# Altium PCB charger.PcbDoc
Units mm, origin at the board's own origin, x right, y up, seen from the top; angles counter-clockwise.
Board outline 60.83 x 20.32 mm, 2 copper layers (Top Layer, Bottom Layer); 29 components, 18 nets, 133 pads, 33 vias.
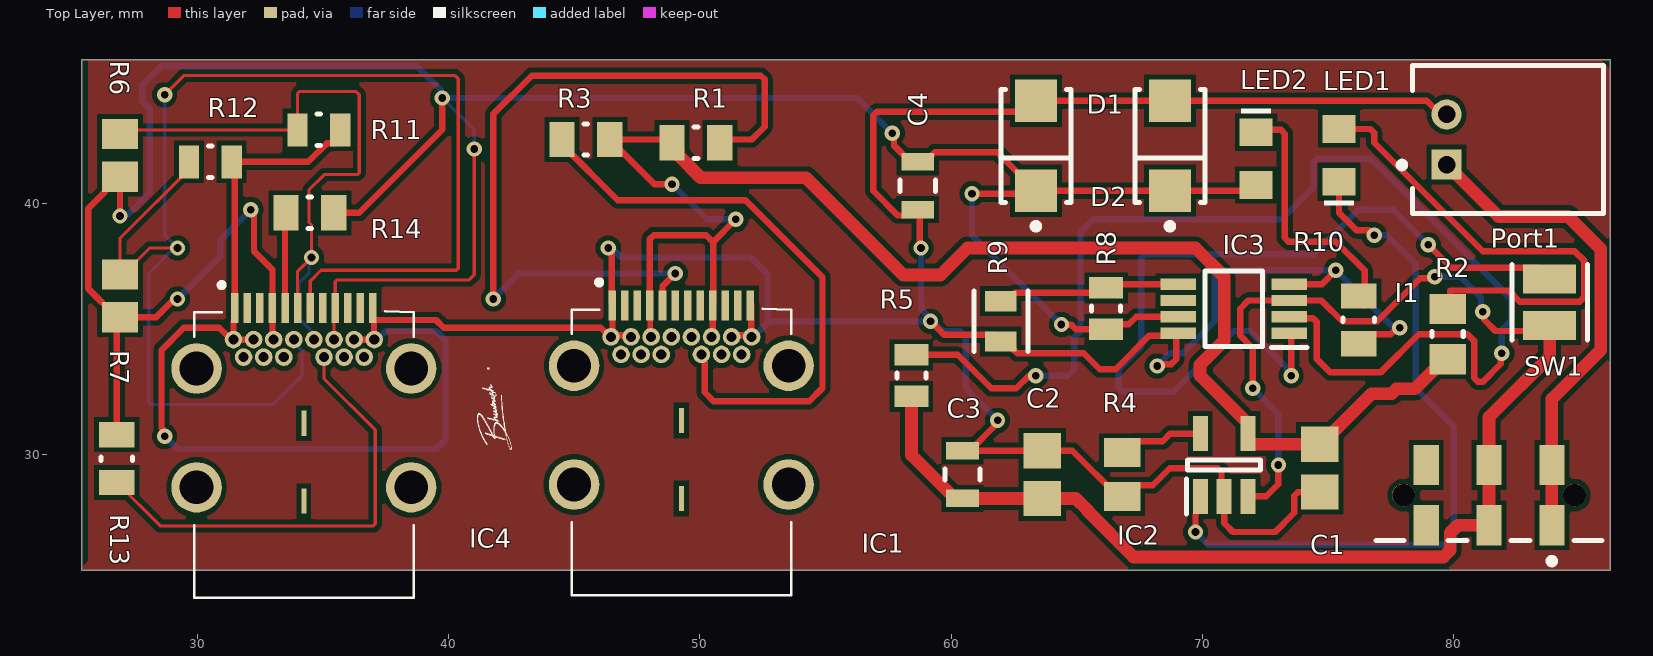
[diagram p0: Top Layer view]
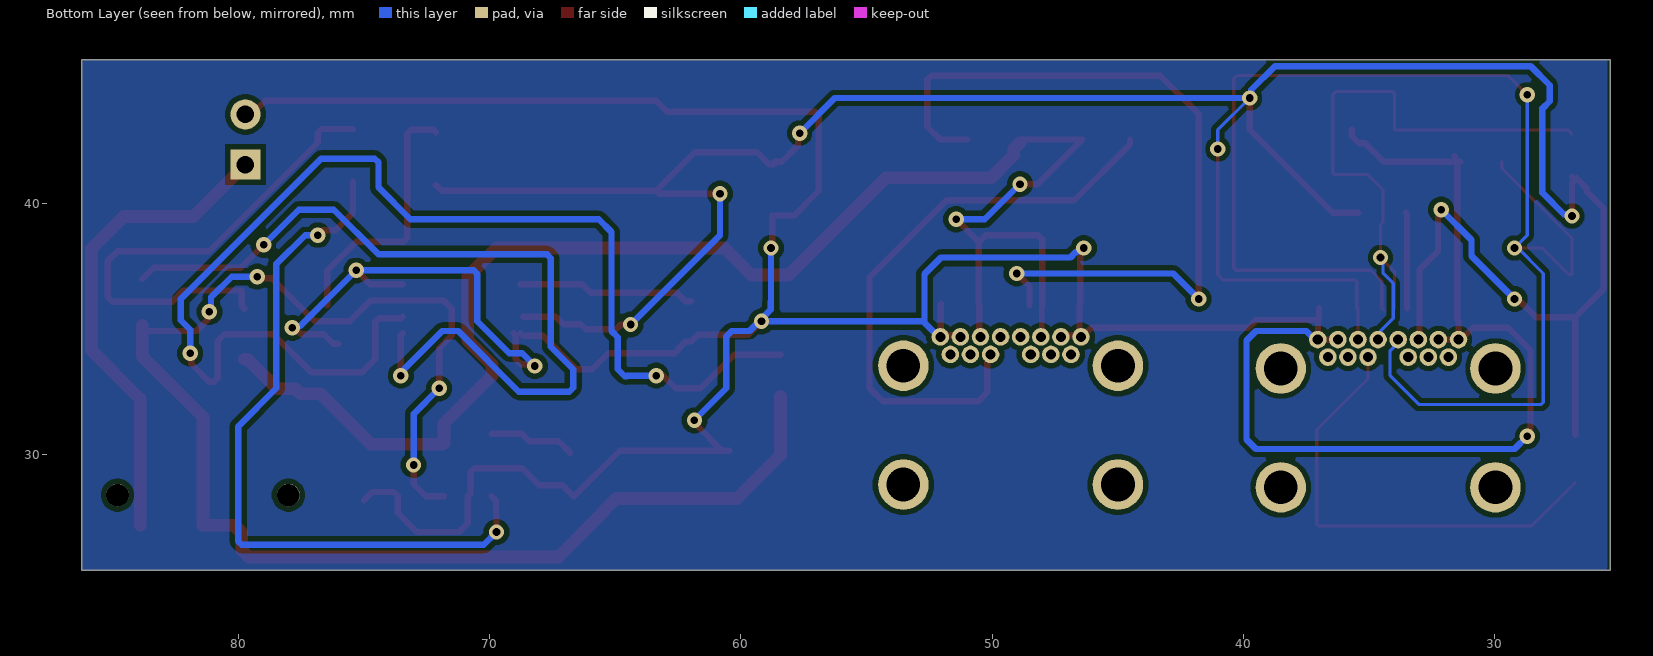
[diagram p1: Bottom Layer view, seen from below]
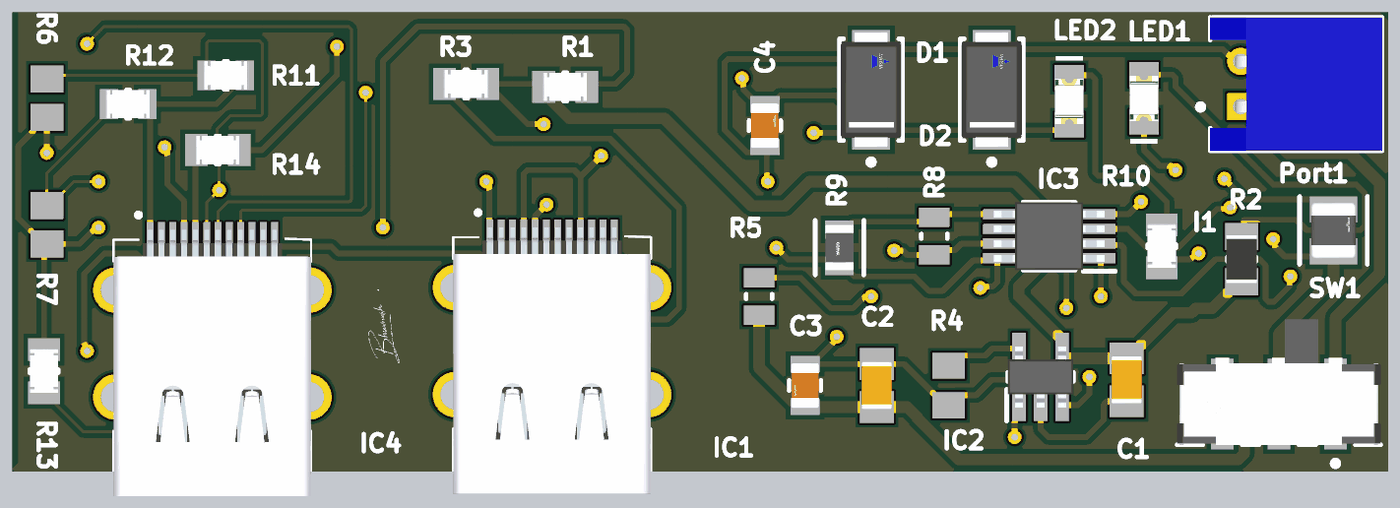
[diagram p2: 3D render of the assembled board from above, using the file's embedded part models]

## Layer stack, top to bottom
Top Solder: solder mask 0.0102, Solder Resist, Dk 3.5
Top Layer: signal copper 0.0356
Dielectric 1: dielectric 0.32, FR-4, Dk 4.8
Bottom Layer: signal copper 0.0356
Bottom Solder: solder mask 0.0102, Solder Resist, Dk 3.5

## Board outline
25.4,25.4 86.233,25.4 86.233,45.72 25.4,45.72

## Design rules (kind name [scope] priority, off if disabled: settings)
Clearance [All] p1: gap=0.203 ignorepadtopadclearanceinfootprint=TRUE
MinimumSolderMaskSliver [All] p1: minsoldermaskwidth=0.076
PolygonConnect [All] p1: connectstyle=Direct reliefconductorwidth=0.254 reliefentries=4 polygonreliefangle="90 Angle" airgapwidth=0.254
RoutingVias [All] p1: holewidth=0.711 width=1.27 viastyle="Through Hole" minholewidth=0.711 minwidth=1.27 maxholewidth=0.711 maxwidth=1.27
SilkToSilkClearance [All] p1: silktosilkclearance=0.104
SilkToSolderMaskClearance [IsPad] p1: minsilkscreentomaskgap=0.127 clearancetoexposedcopper=TRUE
SolderMaskExpansion [All] p1: expansion=0.102 istentingtop=FALSE
SupplyNets "Schematic Supply Nets_1" [InNet('+5')] p1: voltage=0.000
SupplyNets "Schematic Supply Nets" [InNet('GND')] p2: voltage=0.000
Width PowerNets [All] p1: maxlimit=1.27 minlimit=0.127 preferedwidth=0.508
Width [All] p2: maxlimit=0.254 minlimit=0.254 preferedwidth=0.254
27 further rules are at their usual default settings.

## Classes and differential pairs
net class PowerNets: 5VIN +5 NetC2_2 NetI1_2 NetPort1_1
component class Sheet2: C3 C4 D1 D2 LED2 R5 R6 R7 R8 R9 R11 R13
component class Sheet1: C1 C2 IC1 IC2 LED1 Port1 R1 R2 R4 SW1

## Components (designator, comment, footprint, x,y, rotation, side; value= is the part's Value field where it differs from the comment)
C1 "4.7uf" CAPC2013X135X45LL10T25 74.676,29.464 r270 top
C2 "4.7uf" CAPC2013X135X45LL10T25 63.627,29.21 r270 top
C3 "22uf" FP-GRM21B-0_15-MFG 60.452,29.21 r270 top
C4 "22uf" FP-GRM21B-0_15-MFG 58.674,40.706 r90 top
D1 "40v/1.5A" FP-95400-MFG 63.373,42.291 r90 top value=134pF
D2 "40v/1.5A" FP-95400-MFG 68.707,42.291 r90 top value=134pF
I1 "2.2uH" FP-LQM2HPN_G0-IPC_C 83.82,36.068 r90 top
IC1 "632723100011" 632723100011 49.264,30.661 r0 top
IC2 "MCP73831T-2ACI_OT" SOT95P270X145-5N 70.866,29.591 r90 top
IC3 "PAM2401SCADJ" SOP65P490X110-8N 71.247,35.814 r180 top
IC4 "632723100011" 632723100011 34.242,30.552 r0 top
LED1 "CHG" WL-SMCW_0805_150080xx75000 75.438,41.91 r90 top
LED2 "CHG" WL-SMCW_0805_150080xx75000 72.136,41.783 r270 top
Port1 "Battery" JST-S2B-PH-K-S_V 82.169,42.545 r90 top
R1 "56k" FP-CRCW0805-e3-IPC_B 49.846,42.418 r180 top
R2 "1k" RESC2013X60X35ML10T20 79.756,34.798 r90 top
R3 "56k" FP-CRCW0805-e3-IPC_B 45.466,42.545 r0 top
R4 "2k" RESC2013X70X40NL20T20 66.802,29.21 r270 top
R5 "750k" RESC2013X50X30LL20T20 58.42,33.147 r270 top
R6 "75k" RESC2013X60X40NL20T25 26.924,41.91 r270 top
R7 "75k" RESC2013X60X40NL20T25 26.924,36.322 r270 top
R8 "750k" RESC2013X50X30LL20T20 66.167,35.814 r270 top
R9 "100k" FP-RC0805-0_6-IPC_C 61.976,35.306 r90 top
R10 "4.7k" FP-CRCW0805-e3-IPC_B 76.227,35.368 r90 top
R11 "49.9k" FP-CRCW0805-e3-IPC_C 34.836,42.926 r180 top
R12 "49.9k" FP-CRCW0805-e3-IPC_C 30.518,41.656 r180 top
R13 "56k" FP-CRCW0805-e3-IPC_B 26.797,29.845 r90 top
R14 "56k" FP-CRCW0805-e3-IPC_B 34.482,39.624 r0 top
SW1 "PWR" FP-JS102011JAQN-MFG 81.407,28.391 r180 top

## Footprints (in the part's own frame and the unit in brackets; to place one, negate y for a bottom-side part, rotate by r counter-clockwise, add the part's x,y. Pads: shape width x height; smd on the part's side, far side on the other; paste and mask are expansions set on the pad)
632723100011 [mm]
  rect 0.3x1.2 smd: A1(-2.75,5.28) A2(-2.25,5.28) A3(-1.75,5.28) A4(-1.25,5.28) A5(-0.75,5.28) A6(-0.25,5.28) A7(0.25,5.28) A8(0.75,5.28) A9(1.25,5.28) A10(1.75,5.28) A11(2.25,5.28) A12(2.75,5.28)
  round 0.7 hole 0.4: B1(2.8,4.03) B2(2.4,3.33) B3(1.6,3.33) B4(1.2,4.03) B5(0.8,3.33) B6(0.4,4.03) B7(-0.4,4.03) B8(-0.8,3.33) B9(-1.2,4.03) B10(-1.6,3.33) B11(-2.4,3.33) B12(-2.8,4.03) G1(-2,4.03) G2(2,4.03)
  round 2.01 hole 1.34: MH1(-4.27,2.88) MH2(4.27,2.88) MH3(-4.27,-1.85) MH4(4.27,-1.85)
  rect 0.2x1 smd: MP1(0,0.7) MP2(0,-2.4)
  silkscreen extent -4.37,-6.25 4.37,6.25, body extent -4.37,-6.24 4.37,5.55, height 2.93
CAPC2013X135X45LL10T25 [mm] "Chip Capacitor, 2-Leads, Body 2.10x1.35mm, IPC High Density"
  rect 1.4x1.5 smd: 1(-0.95,0) 2(0.95,0)
  body extent -1.05,-0.67 1.05,0.67, height 1.35
FP-95400-MFG [mm]
  rect 1.7x1.68 smd paste+0 mask+0: 1(-1.79,0) 2(1.79,0)
  silkscreen extent -3.32,-1.4 2.25,1.4, body extent -2.74,-1.5 2.74,1.5, height 0.25
FP-CRCW0805-e3-IPC_B [mm]
  rect 1.007x1.408 smd paste+0 mask+0: 1(-0.951,0) 2(0.951,0)
  silkscreen extent -0.07,-0.63 0.07,0.63, body extent -1.7,-0.95 1.7,0.95, height 0.25
FP-CRCW0805-e3-IPC_C [mil]
  rect 31.75x51.5 smd paste+0 mask+0: 1(-33.5,0) 2(33.5,0)
  silkscreen extent -3,-25 3,25, body extent -53,-31 53,31, height 10
FP-GRM21B-0_15-MFG [mm]
  rect 0.7x1.3 smd paste+0 mask+0: 1(-0.95,0) 2(0.95,0)
  silkscreen extent -0.23,-0.7 0.23,0.7, body extent -1.4,-0.8 1.4,0.8, height 0.25
FP-JS102011JAQN-MFG [mm]
  rect 1x1.6 smd paste+0 mask+0: 1(-2.5,-1.2) 1(-2.5,1.2) 2(0,1.2) 2(0,-1.2) 3(2.5,-1.2) 3(2.5,1.2)
  round 0.9 hole 0.9 unplated paste-2539.97 mask+0: ""(-3.4,0) ""(3.4,0)
  silkscreen extent -4.5,1.8 4.5,2.75, body extent -4.6,-3.9 4.6,2.1, height 0.25
FP-LQM2HPN_G0-IPC_C [mm]
  rect 1.155x2.106 smd paste+0 mask+0: 1(-0.926,0) 2(0.926,0)
  silkscreen extent -1.5,-1.5 1.5,1.5, body extent -1.6,-1.2 1.6,1.2, height 0.25
FP-RC0805-0_6-IPC_C [mm]
  rect 0.808x1.262 smd paste+0 mask+0: 1(-0.802,0) 2(0.802,0)
  silkscreen extent -1.21,-1.07 1.21,1.07, body extent -1.31,-0.77 1.31,0.77, height 0.25
JST-S2B-PH-K-S_V [mm] "THD, 2-Leads, Body 7.6x5.9mm, Pitch 2mm"
  rect 1.2x1.2 hole 0.7: 1(-1,2.45)
  round 1.2 hole 0.7: 2(1,2.45)
  silkscreen extent -2.95,-3.8 2.95,4.35, body extent -2.95,-3.8 2.95,3.8, height 4.8
RESC2013X50X30LL20T20 [mm] "Chip Resistor, 2-Leads, Body 2.00x1.25mm, IPC High Density"
  rect 0.85x1.35 smd: 1(-0.825,0) 2(0.825,0)
  silkscreen extent -0.1,-0.58 0.1,0.58, body extent -1.1,-0.72 1.1,0.72, height 0.5
RESC2013X60X35ML10T20 [mm] "Chip Resistor, 2-Leads, Body 2.1x1.35mm, IPC Low Density"
  rect 1.2x1.45 smd: 1(-1,0) 2(1,0)
  silkscreen extent -0.1,-0.63 0.1,0.63, body extent -1.05,-0.68 1.05,0.67, height 0.6
RESC2013X60X40NL20T25 [mm] "Chip Resistor, 2-Leads, Body 2.00x1.25mm, IPC Medium Density"
  rect 1.2x1.45 smd: 1(-0.85,0) 2(0.85,0)
  body extent -1.1,-0.72 1.1,0.72, height 0.6
RESC2013X70X40NL20T20 [mm] "Chip Resistor, 2-Leads, Body 2.2x1.35mm, IPC Medium Density"
  rect 1.15x1.45 smd: 1(-0.875,0) 2(0.875,0)
  body extent -1.1,-0.72 1.1,0.72, height 0.7
SOP65P490X110-8N [mm]
  rect 1.425x0.45 smd: 1(-2.212,0.975) 2(-2.212,0.325) 3(-2.212,-0.325) 4(-2.212,-0.975) 5(2.212,-0.975) 6(2.212,-0.325) 7(2.212,0.325) 8(2.212,0.975)
  silkscreen extent -2.93,-1.5 1.15,1.55, body extent -2.45,-1.5 2.45,1.5, height 1.1
SOT95P270X145-5N [mm]
  rect 1.4x0.6 smd: 1(-1.25,0.95) 2(-1.25,0) 3(-1.25,-0.95) 4(1.25,-0.95) 5(1.25,0.95)
  silkscreen extent -1.95,-1.45 0.2,1.5, body extent -1.35,-1.45 1.35,1.45, height 1.45
WL-SMCW_0805_150080xx75000 [mm] "SMD Mono-color Chip LED, body 2.0x1.25mm"
  rect 1.1x1.3 smd: 1(-1.05,0) 2(1.05,0)
  silkscreen extent -2,-0.6 -1.8,0.6, body extent -1,-0.63 1,0.62, height 0.7

## Part data
C1 C2: library part CMP-1662-00015-2, "Chip Capacitor, 4.7 uF, +/- 10%, 16 V, -55 to 85 degC, 0805 (2012 Metric), RoHS, Tape and Reel", Capacitance="4.7 uF", Case Code (Imperial)=0805, Case Code (Metric)=2012, Max Operating Temperature="85 degC", Min Operating Temperature="-55 degC", Package Quantity=3000, PartNumber=GRM21BR61C475KA88L, Tolerance=10%, Type (Capacitors)=X5R, Voltage Rating="16 V", Case\/Package=0805, ComponentLink1Description="Manufacturer URL", ComponentLink1URL=http://www.murata.com/, ComponentLink2Description=Datasheet, ComponentLink2URL=http://search.murata.co.jp/Ceramy/image/img/A01X/G101/ENG/GRM21BR61C475KA88-01.pdf, DatasheetVersion=03/2016, Height="1.25 mm", Length="2 mm", Mount="Surface Mount", Mounting Technology="Surface Mount", PackageDescription="2-Pin Surface Mount Device, Body 2 x 1.25 mm", PackageReference=0805, Packaging="Tape and Reel", Pins=2, Radiation Hardening=No, REACH SVHC="No SVHC", RoHSCompliant=true, Voltage Rating (DC)="16 V", Width="1.25 mm"
C3 C4: library part CMP-2007-03385-2, "Chip Multilayer Ceramic Capacitors for General Purpose, 0805, 22uF, X5R, 15%, 20%, 6.3V", Capacitance=22uF, Case Code (Imperial)=0805, Case Code (Metric)=2012, Dielectric=X5R, Max Operating Temperature=85°C, Min Operating Temperature=-55°C, Package Quantity=1, Tolerance=20%, Voltage=6.3V, Case/Package=0805, Depth=1.25mm, Height=1.25mm, Lead Free="Lead Free", Length=2mm, Material=Ceramic, Mount="Surface Mount", Packaging="Tape and Reel", Radiation Hardening=No, REACH SVHC="No SVHC", Termination=SMD/SMT, Thickness=0.053inch, Voltage Rating=6.3V, Voltage Rating (DC)=6.3V, Width=0.049inch
D1 D2: library part CMP-02539-000025-1, "DIODE SCHOTTKY 40V 1.5A SMA", Capacitance=134pF, Forward Current=1.5A, Manufacturer=Vishay, Manufacturer Part Number=VS-15MQ040NTRPBF, Max Junction Temp=+150°C, Max Repetitive Reverse Voltage=40V, Max Surge Forward Current=140A, Package=95400, Peak Reverse Current=0.5mA, Temperature="-40°C to +150°C", Temperature Range Low=-40°C, Automotive=No, Category=Diode, ComponentLink2Description=Datasheet, ComponentLink2URL=http://www.vishay.com/docs/94141/vs-15mq040ntrpbf.pdf, Device Class L1="Discrete Semiconductors", Device Class L2=Diodes, Device Class L3="Schottky Diodes", Digikey Description="DIODE SCHOTTKY 40V 1.5A SMA", Footprint Url=http://www.vishay.com/docs/95400/sma.pdf, Height=2.29mm, Lead Free=Yes, Mouser Description="Schottky Diodes & Rectifiers 2.1 Amp 40 Volt", Octopart=https://octopart.com/vs-15mq040ntrpbf-vishay-44340959, Reverse Voltage=40V, RoHS=TRUE, Standoff Height=0mm, Temperature Range High=+150°C
I1: library part CMP-1662-00028-2, "Multilayer Type Inductor for Power Lines, 1008 (2520), 2.2μH, 20%, 0.1Ω, 1.3A", Case Code (Imperial)=1008, Case Code (Metric)=2520, Current Rating=1.3A, DC Resistance (DCR)=100mR, Inductance Tolerance=20%, Max Operating Temperature=125°C, Min Operating Temperature=-55°C, Package Quantity=3000, Self Resonant Frequency=40MHz, Test Frequency=1MHz, Case/Package=1008, Core Material=Ferrite, DC Current=1.3A, Depth=2.2mm, Height=1.2mm, Height - Seated (Max)=0.039inch, Inductance=2.2uH, Lead Free="Lead Free", Length=2.5mm, Max DC Current=1.3A, Military Standard=Not, Mount="Surface Mount", Packaging="Tape and Reel", Radiation Hardening=No, REACH SVHC="No SVHC", Series=LQM2HP_G0, Shielding=Shielded, Termination=SMD/SMT, Tolerance=20%, Width=2mm
IC1 IC4: "Integrated Circuit", Manufacturer_Name="Wurth Elektronik", Mouser Part Number=710-632723100011, Datasheet Link=https://componentsearchengine.com/Datasheets/1/632723100011.pdf, Height=3.11mm, Manufacturer_Part_Number=632723100011, Mouser Price/Stock=https://www.mouser.co.uk/ProductDetail/Wurth-Elektronik/632723100011?qs=NK6InXoXhq4o62C9ULXLjQ%3D%3D
IC2: "Integrated Circuit", Arrow Part Number=MCP73831T-2ACI/OT, Manufacturer_Name=Microchip, Mouser Part Number=579-MCP73831T-2ACIOT, Arrow Price/Stock=https://www.arrow.com/en/products/mcp73831t-2aciot/microchip-technology?utm_currency=USD&region=nac, Datasheet Link=http://ww1.microchip.com/downloads/en/DeviceDoc/20001984g.pdf, Height=1.45mm, Manufacturer_Part_Number=MCP73831T-2ACI/OT, Mouser Price/Stock=https://www.mouser.co.uk/ProductDetail/Microchip-Technology/MCP73831T-2ACI-OT?qs=yUQqVecv4qvbBQBGbHx0Mw%3D%3D
IC3: "Integrated Circuit", Manufacturer_Name="Diodes Incorporated", Mouser Part Number=621-PAM2401SCADJ, Arrow Part Number=PAM2401SCADJ, Arrow Price/Stock=https://www.arrow.com/en/products/pam2401scadj/diodes-incorporated?region=nac, Datasheet Link=https://www.diodes.com//assets/Datasheets/PAM2401.pdf, Height=1.1mm, Manufacturer_Part_Number=PAM2401SCADJ, Mouser Price/Stock=https://www.mouser.co.uk/ProductDetail/Diodes-Incorporated/PAM2401SCADJ?qs=Ay79KZaUeZCprHtLIDXq%252BQ%3D%3D
LED1: library part CMP-1426-00011-3, "LED Uni-Color Red 630nm 2-Pin Chip 0805(2012Metric) T/R", Case Code (Imperial)=0805, Case Code (Metric)=2012, Color=Red, Forward Current=100mA, Forward Voltage=2V, Max Junction Temperature (Tj)=95°C, Max Operating Temperature=85°C, Max Reverse Voltage (DC)=5V, Min Operating Temperature=-40°C, Power Dissipation=72mW, Test Current=20mA, Case/Package=0805, Dominant Wavelength=625nm, Height=700µm, Length=2mm, Lens Style="Clear, Rectangular", Luminous Intensity=150mcd, Mount="Surface Mount", Packaging="Tape and Reel", Peak Wavelength=630nm, REACH SVHC=Unknown, RoHS=Compliant, Viewing Angle=140°, Wavelength=625nm, Width=1.25mm
LED2: library part CMP-1426-00008-7, "Led, Blue, 470 Nm, 3.2 V, 30 Ma, 145 Mcd Rohs Compliant: Yes", Case Code (Imperial)=0805, Case Code (Metric)=2012, Color=Blue, Forward Current=100mA, Forward Voltage=3.2V, Max Junction Temperature (Tj)=95°C, Max Operating Temperature=85°C, Max Reverse Voltage (DC)=5V, Min Operating Temperature=-40°C, Power Dissipation=105mW, Test Current=20mA, Case/Package=0805, Dominant Wavelength=470nm, Height=700µm, Lead Free="Lead Free", Length=2mm, Lens Style="Clear, Rectangular", Luminous Intensity=145mcd, Mount="Surface Mount", Packaging="Tape and Reel", Peak Wavelength=465nm, REACH SVHC=Unknown, Reverse Voltage=5V, RoHS=Compliant, Viewing Angle=140°, Wavelength=470nm, Width=1.25mm
Port1: library part CMP-1755-00004-1, "Male Header, Pitch 2 mm, 1 x 2 Position, Height 4.8 mm, Tail Length 3.4 mm, -25 to 85 degC, RoHS, Bulk", Capacitance="10 uF", Case\Package=Radial, Max Operating Temperature="85 degC", Min Operating Temperature="-40 degC", Package Quantity=200, Tolerance=20%, Voltage Rating="50 V", ComponentLink1Description=Datasheet, ComponentLink1URL=http://www.jst-mfg.com/product/pdf/eng/ePH.pdf, DatasheetVersion=Dec-12, Diameter="5 mm", Height="11 mm", Lead Pitch="2 mm", Length="11 mm", Mount="Through Hole", PackageDescription="Male Header, Pitch 2 mm, 1 x 2 Position, Height 4.8 mm, Tail Length 3.4 mm", PackageReference=S2B-PH-K-S, Packaging=Bulk, Pins=2, Radiation Hardening=No, REACH SVHC="No SVHC", RoHSCompliant=true, Voltage Rating (DC)="50 V"
R1 R3 R13 R14: library part CMP-2001-04015-2, "RES Thick Film, 56kΩ, 1%, 0.125W, 100ppm/°C, 0805", Case Code (Imperial)=0805, Case Code (Metric)=2012, Max Operating Temperature=155°C, Max Power Dissipation=125mW, Min Operating Temperature=-55°C, Package Quantity=10, Resistance=56kR, Temperature Coefficient=100ppm/°C, Tolerance=1%, Voltage Rating=150V, Case/Package=0805, Composition="Thick Film", Contact Plating=Tin, Depth=1.25mm, Features="Automotive AEC-Q200", Height=0.45mm, Lead Free="Lead Free", Length=2mm, Military Standard=Not, Mount="Surface Mount", Number of Pins=2, Number of Terminations=2, Packaging="Tape and Reel", Power Rating=125mW, Radiation Hardening=No, Termination=SMD/SMT, Voltage Rating (DC)=150V, Weight=0.000194oz, Width=1.25mm
R2: library part CMP-2100-03671-1, "Chip Resistor, 1 KOhm, +/- 1%, 125 mW, -55 to 155 degC, 0805 (2012 Metric), RoHS, Tape and Reel", Case Code (Imperial)=0805, Case Code (Metric)=2012, Manufacturer=Yageo, Max Operating Temperature=155degC, Max Power Dissipation=125mW, Min Operating Temperature=-55degC, Package Description="2-Pin Surface Mounted Device, Body 2 x 1.25 mm", Package Quantity=1, Resistance=1KOhm, Temperature Coefficient=100ppm/degreesC, Tolerance=1%, Voltage Rating=150V, Case/Package=0805, Composition=ThickFilm, Datasheet URL=http://www.yageo.com/NewPortal/yageodocoutput?fileName=/pdf/R-Chip/PYu-RC_Group_51_RoHS_L_5.pdf, Datasheet Version="Rev. 5, 10/2016", Depth=1.25mm, Height=0.024inch, Lead Free=LeadFree, Length=0.079inch, Manufacturer URL=http://www.yageo.com/, Military Standard=Not, Number of Pins=2, Number of Terminations=2, Package Reference=0805, Packaging=TapeandReel, Power Rating=125mW, REACH SVHC=Unknown, RoHSCompliant=true, Termination=SMD/SMT, Voltage Rating (DC)=150V, Width=0.049inch
R4: library part CMP-2001-00026-5, "Chip Resistor, 2 KOhm, +/- 1%, 0.125 W, -55 to 155 degC, 0805 (2012 Metric), RoHS, Tape and Reel", Manufacturer=Panasonic, Max Operating Temperature="155 degC", Min Operating Temperature="-55 degC", Package Quantity=5000, Voltage Rating="150 V", ComponentLink1Description="Manufacturer URL", ComponentLink1URL=http://www.panasonic.com/, ComponentLink2Description=Datasheet, ComponentLink2URL=http://industrial.panasonic.com/cdbs/www-data/pdf/RDA0000/AOA0000C86.pdf, DatasheetVersion=04/2015, Height="0.6 mm", Length="2 mm", Mount="Surface Mount", Mounting Technology="Surface Mount", PackageDescription="2-Pin Surface Mount Device, Body 2 x 1.25 mm", PackageReference=0805, Packaging="Tape and Reel", REACH SVHC=Unknown, RoHSCompliant=true
R5 R8: library part CMP-2001-04102-1, Manufacturer="Vishay Dale", Part Number=CRCW0805750KFKEA
R6 R7: library part CMP-2001-00668-1, Manufacturer=Panasonic, Part Number=ERA6AEB753V
R9: library part CMP-2100-03668-5, "RES 100K OHM 1% 1/8W 0805", Case Code (Imperial)=0805, Case Code (Metric)=2012, Max Operating Temperature=155°C, Max Power Dissipation=125mW, Min Operating Temperature=-55°C, Package Quantity=1, Resistance=100kR, Resistance Tolerance=1%, Resistor Type="Thick Film", Temperature Coefficient=100ppm/°C, Voltage Rating=150V, Case/Package=0805, Construction=Rectangular, Depth=1.25mm, Features="Moisture Resistant", Height=0.024inch, Lead Free="Lead Free", Lead Pitch=0.4mm, Length=0.079inch, Military Standard=Not, Number of Pins=2, Number of Terminations=2, Packaging="Tape and Reel", Power Rating=125mW, RoHS Compliant=Yes, Series=RC, Size Code=0805, Technology="THICK FILM", Termination=SMD/SMT, Tolerance=1%, Voltage Rating (DC)=150V, Width=0.049inch
R10: library part CMP-2100-03615-2, "RES Thick Film, 4.7kΩ, 1%, 0.125W, 100ppm/°C, 0805", Case Code (Imperial)=0805, Case Code (Metric)=2012, Max Operating Temperature=155°C, Max Power Dissipation=125mW, Min Operating Temperature=-55°C, Package Quantity=10, Resistance=4.7kR, Temperature Coefficient=100ppm/°C, Tolerance=1%, Voltage Rating=150V, Case/Package=0805, Composition="Thick Film", Contact Plating=Tin, Depth=1.25mm, Features="Automotive AEC-Q200", Height=0.45mm, Lead Free="Lead Free", Length=2mm, Military Standard=Not, Number of Terminations=2, Packaging="Tape and Reel", Power Rating=125mW, Radiation Hardening=No, Termination=SMD/SMT, Voltage Rating (DC)=150V, Weight=0.000194oz, Width=1.25mm
R11 R12: library part CMP-2001-03952-2, "RES Thick Film, 49.9kΩ, 1%, 0.125W, 100ppm/°C, 0805", Case Code (Imperial)=0805, Case Code (Metric)=2012, Max Operating Temperature=155°C, Max Power Dissipation=125mW, Min Operating Temperature=-55°C, Package Quantity=10, Resistance=49.9kR, Temperature Coefficient=100ppm/°C, Tolerance=1%, Voltage Rating=150V, Case/Package=0805, Composition="Thick Film", Contact Plating=Tin, Depth=1.25mm, Features="Automotive AEC-Q200", Height=0.45mm, Lead Free="Lead Free", Length=2mm, Military Standard=Not, Mount="Surface Mount", Number of Terminations=2, Packaging="Tape and Reel", Power Rating=125mW, Radiation Hardening=No, Termination=SMD/SMT, Voltage Rating (DC)=150V, Weight=0.000194oz, Width=0.049inch
SW1: library part CMP-10038-000001-1, "SWITCH SLIDE SPDT 300MA 6V", Contact Current Rating=300mA, Contact Resistance=70mΩ, Manufacturer=C&K, Manufacturer Part Number=JS102011JAQN, Temperature="-40°C to +85°C", Temperature Range High=+85°C, Temperature Range Low=-40°C, Voltage Rating Dc=6V, Automotive=No, Category=Switch, ComponentLink2Description=Datasheet, ComponentLink2URL=https://www.ckswitches.com/media/1422/js.pdf, Device Class L1=Electromechanical, Device Class L2=Switches, Device Class L3="Slide Switches", Digikey Description="SWITCH SLIDE SPDT 300MA 6V", Electromechanical Life=5000Cycles, Height=3.5mm, Lead Free=Yes, Mount="Surface Mount", Mouser Description="JS Series Sub-Miniature Slide Switch SPDT Right-Angle SMT", Octopart=https://octopart.com/js102011jaqn-c%26k+components-74831566, Package=JS102011JAQN, RoHS=TRUE, Throw Configuration=SPDT

## Via types
v1: diameter 0.61, hole 0.305, Top Layer to Bottom Layer, 33 vias

## Nets (pads, with @x,y where several pads share a name; then routed paths per layer and width w, separated by ;. In a path a pad name is that pad's centre, name@x,y a point inside that pad or via, vN(x,y) a via of type N, cw(c..) or ccw(c..) an arc to the next point about the centre after c; other vN are vias at no path point)
5VIN: C1.1 IC1.A4 IC1.A9 IC1.B4 IC1.B9 IC2.4 R1.2 R2.1 R3.2 | length 63
  Top Layer w0.203: IC1.A4@48.026,36.001 48.026,34.801 IC1.B9@48.076,34.751
  Top Layer w0.254: IC1.A4 48.014,38.586 48.163,38.735 50.25,38.735 50.526,38.459 ; v1(48.895,40.767) 48.195,40.767 R3.2 48.768,42.545 R1.2 ; IC1.B4@50.476,34.751 50.506,34.781 50.506,35.981 50.526,36.001 50.526,38.459 ; v1(51.435,39.37) 51.435,39.368 50.526,38.459
  Top Layer w0.508: R1.2 49.144,42.169 49.144,41.915 50.037,41.022 54.228,41.022 58.094,37.156 59.576,37.156 60.647,38.227 69.723,38.227 70.866,37.084 70.866,34.544 69.9,33.578 69.9,33.157 71.816,31.241 IC2.4 71.816,30.46 71.862,30.414 C1.1 74.726,30.414 76.741,32.429 77.537,32.429 77.728,32.621 78.454,32.621 79.631,33.798 R2.1
  Bottom Layer w0.254: v1@48.768,40.836 48.826,40.836 50.292,39.37 v1(51.435,39.37)
+5: C4.2 D1.1 D2.1 IC3.7 IC4.A4 IC4.A9 IC4.B4 IC4.B9 LED2.2 R6.2 R7.2 R8.2 R13.2 R14.2 | length 115.8
  Top Layer w0.127: R14.2 R14.2@35.492,39.565 ; IC4.B4 IC4.A9@35.442,35.832 ; IC4.A9 35.492,36.889 35.56,36.957 40.82,36.957 41.021,37.158 v1(41.021,42.164)
  Top Layer w0.254: R6.2@26.735,40.996 26.326,40.587 26.326,40.462 25.654,39.79 25.654,36.617 26.799,35.472 R7.2 ; R13.2 26.797,35.345 R7.2 ; v1(26.924,39.497) 26.924,40.806 26.797,40.933 R6.2 ; v1(29.21,36.195) 29.083,36.195 28.36,35.472 R7.2 ; v1(32.131,39.751) 32.258,39.624 32.258,38.1 32.992,37.366 IC4.A4 32.992,34.632 IC4.B9 ; R14.2 36.449,39.624 39.751,42.926 v1(39.751,44.196) ; v1(57.658,42.799) 57.726,42.731 57.726,42.304 58.374,41.656 C4.2 ; C4.2@58.674,41.551 58.869,41.551 59.197,41.879 59.197,41.888 59.346,42.037 61.837,42.037 62.65,41.224 62.66,41.224 63.373,40.511 D1.1 ; v1(60.833,40.386) 63.258,40.386 D1.1 ; v1(64.389,35.179) 64.77,35.179 64.96,34.989 R8.2 66.375,35.197 67.074,35.197 67.366,35.489 IC3.7@68.654,35.489 ; LED2.2 71.904,40.501 D2.1 D1.1
  Bottom Layer w0.127: v1(39.751,44.196) 41.021,42.926 v1(41.021,42.164)
  Bottom Layer w0.254: v1(26.924,39.497) 26.992,39.565 27.246,39.565 28.101,40.42 28.101,43.781 27.813,44.069 27.813,44.704 28.575,45.466 38.735,45.466 39.683,44.518 39.683,44.264 v1(39.751,44.196) 56.261,44.196 v1(57.658,42.799) ; v1(29.21,36.195) 30.924,37.91 30.924,38.544 v1(32.131,39.751) ; v1(60.833,40.386) 60.833,38.735 v1(64.389,35.179)
CC1_IN: IC1.A5 R1.1 | length 31.7
  Top Layer w0.254: v1(41.783,36.195) 41.783,43.561 43.307,45.085 52.429,45.085 52.578,44.936 52.578,43.053 52.07,42.545 R1.1@50.989,42.545 ; IC1.A5 48.514,36.703 v1(49.022,37.211)
  Bottom Layer w0.254: v1(41.783,36.195) 42.799,37.211 v1(49.022,37.211)
CC1_OUT: IC4.A5 R14.1 | length 3.8
  Top Layer w0.254: IC4.A5 33.492,39.585 R14.1
CC2_IN: IC1.B5 R3.1 | length 23.8
  Top Layer w0.254: R3.1 44.515,42.344 46.727,40.132 51.816,40.132 54.881,37.067 54.881,32.656 54.356,32.131 50.546,32.131 50.196,32.481 50.196,33.679 50.161,33.714 50.161,33.966 IC1.B5@50.076,34.051
CC2_OUT: IC4.B5 R13.1 | length 18.5
  Top Layer w0.127: R13.1 28.523,27.168 37.01,27.168 37.084,27.242 37.084,30.988 35.042,33.03 IC4.B5
D+: IC4.A6 IC4.B6 R6.1 R11.2 | length 25.2
  Top Layer w0.127: R6.1 27.09,42.926 R11.2 33.985,44.376 34.06,44.45 36.322,44.45 36.449,44.323 36.449,41.222 36.375,41.148 35.052,41.148 34.447,40.543 34.447,39.245 34.544,39.148 v1(34.544,37.846) 33.992,37.294 IC4.A6
  Bottom Layer w0.127: v1(34.544,37.846) 34.452,37.754 34.452,37.234 34.036,36.818 34.036,35.433 34.532,34.937 34.532,34.692 IC4.B6
D-: IC4.A7 IC4.B7 R7.1 R12.2 | length 56.5
  Top Layer w0.127: v1(28.702,44.323) 29.464,45.085 40.259,45.085 40.386,44.958 40.386,37.412 40.312,37.338 34.925,37.338 34.492,36.905 IC4.A7 IC4.A7@34.409,35.749 ; v1@29.337,38.227 v1(29.21,38.227) 28.104,38.227 27.049,37.172 R7.1 26.924,38.611 29.718,41.405 R12.2@29.718,41.656
  Bottom Layer w0.127: v1(28.702,44.323) 28.702,38.735 v1@29.146,38.291 ; v1(29.21,38.227) v1@29.146,38.291 ; IC4.B7 33.842,34.46 34.163,34.139 34.163,33.147 33.02,32.004 28.141,32.004 28.067,32.078 28.067,37.211 v1@29.146,38.291
EN: IC3.2 R5.1 | length 49.7
  Top Layer w0.254: R5.1 60.261,33.972 61.594,32.639 62.59,32.639 63.098,33.147 v1(63.373,33.147) ; IC3.2 73.515,35.433 74.4,35.433 74.549,35.284 74.549,33.807 75.082,33.274 77.089,33.274 78.613,34.798 80.548,34.798 80.811,34.535 80.811,33.059 80.96,32.91 81.17,32.91 81.875,33.615 81.875,33.996 v1(81.915,34.036)
  Bottom Layer w0.254: v1(63.373,33.147) 64.516,33.147 64.538,33.125 64.621,33.125 64.897,33.401 64.897,34.671 65.151,34.925 65.151,38.862 65.659,39.37 73.152,39.37 74.422,40.64 74.422,41.634 74.571,41.783 76.708,41.783 82.296,36.195 82.296,35.354 81.915,34.973 v1(81.915,34.036)
GND: C1.2 C2.1 C3.1 C4.1 D1.2 D2.2 IC1.A1 IC1.A12 IC1.B1 IC1.B12 IC1.G1 IC1.G2 IC2.2 IC3.4 IC3.8 IC4.A1 IC4.A12 IC4.B1 IC4.B12 IC4.G1 IC4.G2 Port1.2 R4.2 R9.1 R10.1 R11.1 R12.1 | length 162.5
  Top Layer w0.254: v1(28.702,30.734) 28.634,30.802 28.634,31.002 28.575,31.061 28.575,34.163 29.464,35.052 30.878,35.052 31.348,34.582 IC4.B12 ; IC4.G1 IC4.B12 ; R11.1 35.687,42.675 35.411,42.399 35.16,42.399 34.417,41.656 31.492,41.656 R12.1 31.492,41.533 IC4.A1 31.492,35.382 31.442,35.332 IC4.B12 ; IC4.G2 IC4.B1 ; IC4.A12 36.992,35.382 IC4.A12@37.015,35.359 ; IC4.B1@37.033,34.591 37.033,35.341 IC4.A12@37.015,35.359 ; v1(46.355,38.227) 46.491,38.091 46.491,36.036 46.526,36.001 46.526,34.801 IC1.B12@46.476,34.751 ; IC1.G1@47.276,34.751 IC1.B12@46.476,34.751 ; IC1.G2@51.276,34.751 51.905,34.751 IC1.B1@52.049,34.895 ; IC1.A12@52.026,36.001 52.049,35.978 IC1.B1@52.049,34.895 ; IC1.B1@52.076,34.751 52.076,34.922 IC1.B1@52.049,34.895 ; v1(58.801,38.227) 58.756,38.272 58.756,39.519 57.881,39.519 56.896,40.504 56.896,43.501 57.045,43.649 62.941,43.649 D1.2 D2.2 78.927,44.081 79.463,43.545 Port1.2 ; v1(59.182,35.306) 59.707,34.781 61.699,34.781 R9.1 62.203,34.504 62.48,34.227 62.48,34.185 62.629,34.036 65.278,34.036 65.913,33.401 66.548,33.401 67.888,34.741 68.683,34.741 IC3.8@68.781,34.839 ; C3.1 C3.1@60.752,30.16 ; v1(61.849,31.369) 61.722,31.242 61.722,31.13 C3.1@60.752,30.16 ; v1(68.199,33.528) 68.267,33.596 68.753,33.596 68.961,33.804 68.961,34.765 IC3.8 ; IC3.4 74.762,36.789 v1(75.311,37.338) ; C1.2@74.996,28.194 C1.2 73.809,28.514 73.66,28.365 73.66,27.686 72.898,26.924 71.216,26.924 70.866,27.274 IC2.2 70.761,28.446 70.761,29.315 70.612,29.464 68.707,29.464 68.026,28.783 67.1,28.783 66.652,28.335 64.827,30.16 C2.1 C3.1@60.752,30.16 ; R10.1@76.026,34.417 R10.1 76.603,34.793 77.496,34.793 77.755,35.052 v1(77.851,35.052) ; IC4.A12@37.015,35.359 39.5,35.359 39.806,35.052 46.054,35.052 46.355,34.751 IC1.B12@46.476,34.751
  Bottom Layer w0.254: v1(28.702,30.734) 29.21,30.226 39.497,30.226 39.878,30.607 39.878,34.544 39.497,34.925 37.506,34.925 37.163,34.582 IC4.B1 ; v1(46.355,38.227) 46.504,38.227 46.504,38.174 46.608,38.07 46.66,38.07 46.885,37.846 52.035,37.846 52.691,37.189 52.691,35.366 ; IC1.B1@52.076,34.751 52.197,34.751 52.752,35.306 v1(59.182,35.306) ; v1(58.801,38.227) 58.801,36.089 58.808,36.082 58.808,35.776 59.182,35.402 v1(59.182,35.306) ; v1(61.849,31.369) 60.579,32.639 60.579,34.706 60.36,34.925 59.659,34.925 59.278,35.306 v1(59.182,35.306) ; v1@68.072,33.528 v1(68.199,33.528) 68.707,34.036 69.215,34.036 70.485,35.306 70.485,37.189 70.634,37.338 v1(75.311,37.338) 77.529,35.12 77.783,35.12 v1(77.851,35.052)
NetC2_2: C2.2 C3.2 I1.1 IC2.3 IC3.3 R5.2 SW1.2 | length 61.1
  Top Layer w0.254: IC2.3 72.537,28.341 73.025,28.829 v1(73.025,29.591) v1@73.152,29.718 ; v1(72.009,32.639) 72.009,34.237 71.501,34.745 71.501,35.814 71.826,36.139 IC3.3 74.732,36.139 75.565,35.306 76.962,35.306 78.672,37.016 79.18,37.016 v1(79.248,37.084) ; v1(81.153,35.687) 81.221,35.619 81.221,35.365 81.661,34.925 83.603,34.925 I1.1
  Top Layer w0.508: R5.2 58.42,29.992 60.152,28.26 C3.2 C2.2 64.958,28.26 65.423,27.795 65.423,27.768 67.257,25.934 79.596,25.934 79.864,26.202 79.864,26.893 80.162,27.191 81.407,27.191 81.407,29.591 81.407,31.496 83.82,33.909 83.82,34.925 I1.1
  Bottom Layer w0.254: v1(72.009,32.639) 73.025,31.623 v1(73.025,29.591) ; v1(79.248,37.084) 80.264,37.084 81.085,36.263 81.085,35.755 v1(81.153,35.687)
NetI1_2: I1.2 IC3.1 | length 34.2
  Top Layer w0.254: IC3.1 73.533,34.765 v1(73.533,33.147) ; v1(78.994,38.354) 79.904,37.444 83.37,37.444 I1.2
  Bottom Layer w0.254: v1(73.533,33.147) 73.533,33.274 71.882,34.925 71.247,34.925 68.834,32.512 66.824,32.512 66.675,32.661 66.675,33.401 67.564,34.29 67.564,37.824 67.713,37.973 74.422,37.973 76.2,39.751 77.597,39.751 v1(78.994,38.354)
NetIC2_1: IC2.1 LED1.1 | length 28.8
  Top Layer w0.254: v1(69.723,26.924) 69.723,27.61 69.743,27.63 69.743,28.168 IC2.1 ; LED1.1 75.438,39.624 76.133,38.929 76.641,38.929 v1(76.835,38.735)
  Bottom Layer w0.254: v1(69.723,26.924) 70.231,26.416 79.861,26.416 80.01,26.565 80.01,31.115 78.486,32.639 78.486,37.592 77.343,38.735 v1(76.835,38.735)
NetIC2_5: IC2.5 R4.1 | length 3.4
  Top Layer w0.254: R4.1 67.25,30.533 68.418,30.533 68.726,30.841 IC2.5
NetIC3_5: IC3.5 R8.1 R9.2 | length 7.1
  Top Layer w0.254: R9.2 62.203,36.108 62.544,36.449 65.977,36.449 66.317,36.789 IC3.5@68.781,36.789
NetLED1_2: LED1.2 R2.2 | length 20
  Top Layer w0.254: LED1.2 76.686,42.96 76.835,42.811 76.835,42.418 81.153,38.1 84.811,38.1 85.203,37.708 85.203,36.279 85.01,36.086 82.63,36.086 82.18,36.536 79.866,36.536 79.866,35.908 R2.2
NetLED2_1: LED2.1 R10.2 | length 10.5
  Top Layer w0.254: LED2.1 72.229,42.926 73.13,42.926 73.279,42.777 73.279,38.63 73.428,38.481 75.311,38.481 76.454,37.338 R10.2@76.454,35.941
NetPort1_1: Port1.1 SW1.1 | length 19.3
  Top Layer w0.508: Port1.1 81.784,39.48 84.56,39.48 85.852,38.188 85.852,34.163 83.907,32.218 83.907,29.591 83.9,29.584 83.9,27.198 SW1.1@83.907,27.191
pads on no net: IC1.A2 IC1.A3 IC1.A6 IC1.A7 IC1.A8 IC1.A10 IC1.A11 IC1.B2 IC1.B3 IC1.B6 IC1.B7 IC1.B8 IC1.B10 IC1.B11 IC1.MH1 IC1.MH2 IC1.MH3 IC1.MH4 IC1.MP1 IC1.MP2 IC3.6 IC4.A2 IC4.A3 IC4.A8 IC4.A10 IC4.A11 IC4.B2 IC4.B3 IC4.B8 IC4.B10 IC4.B11 IC4.MH1 IC4.MH2 IC4.MH3 IC4.MH4 IC4.MP1 IC4.MP2 SW1. SW1.3

## Polygon pours and split planes (outlines as drawn)
no net on Bottom Layer "NONET_L02_P003" (solid, pour order 3): 25.527,25.527 25.4,25.4 86.233,25.4 86.233,45.593 86.106,45.72 25.527,45.72 25.527,45.466
no net on Top Layer "NONET_L01_P004" (solid, pour order 4): 25.654,45.72 25.654,25.781 25.4,25.527 25.527,25.4 86.233,25.4 86.233,45.339 85.852,45.72 25.527,45.72

## Silkscreen, mask and mechanical layers (free items; w line width, h text height)
Top Overlay:
  drawing of 4 lines, arcs and shapes, not listed